# Altium PCB PCB1.PcbDoc
Units mm, origin at the board's own origin, x right, y up, seen from the top; angles counter-clockwise.
Board outline 68 x 58 mm, 2 copper layers (Top Layer, Bottom Layer); 74 components, 73 nets, 275 pads, 50 vias.
Unrouted connection lines stored in the file: 5.
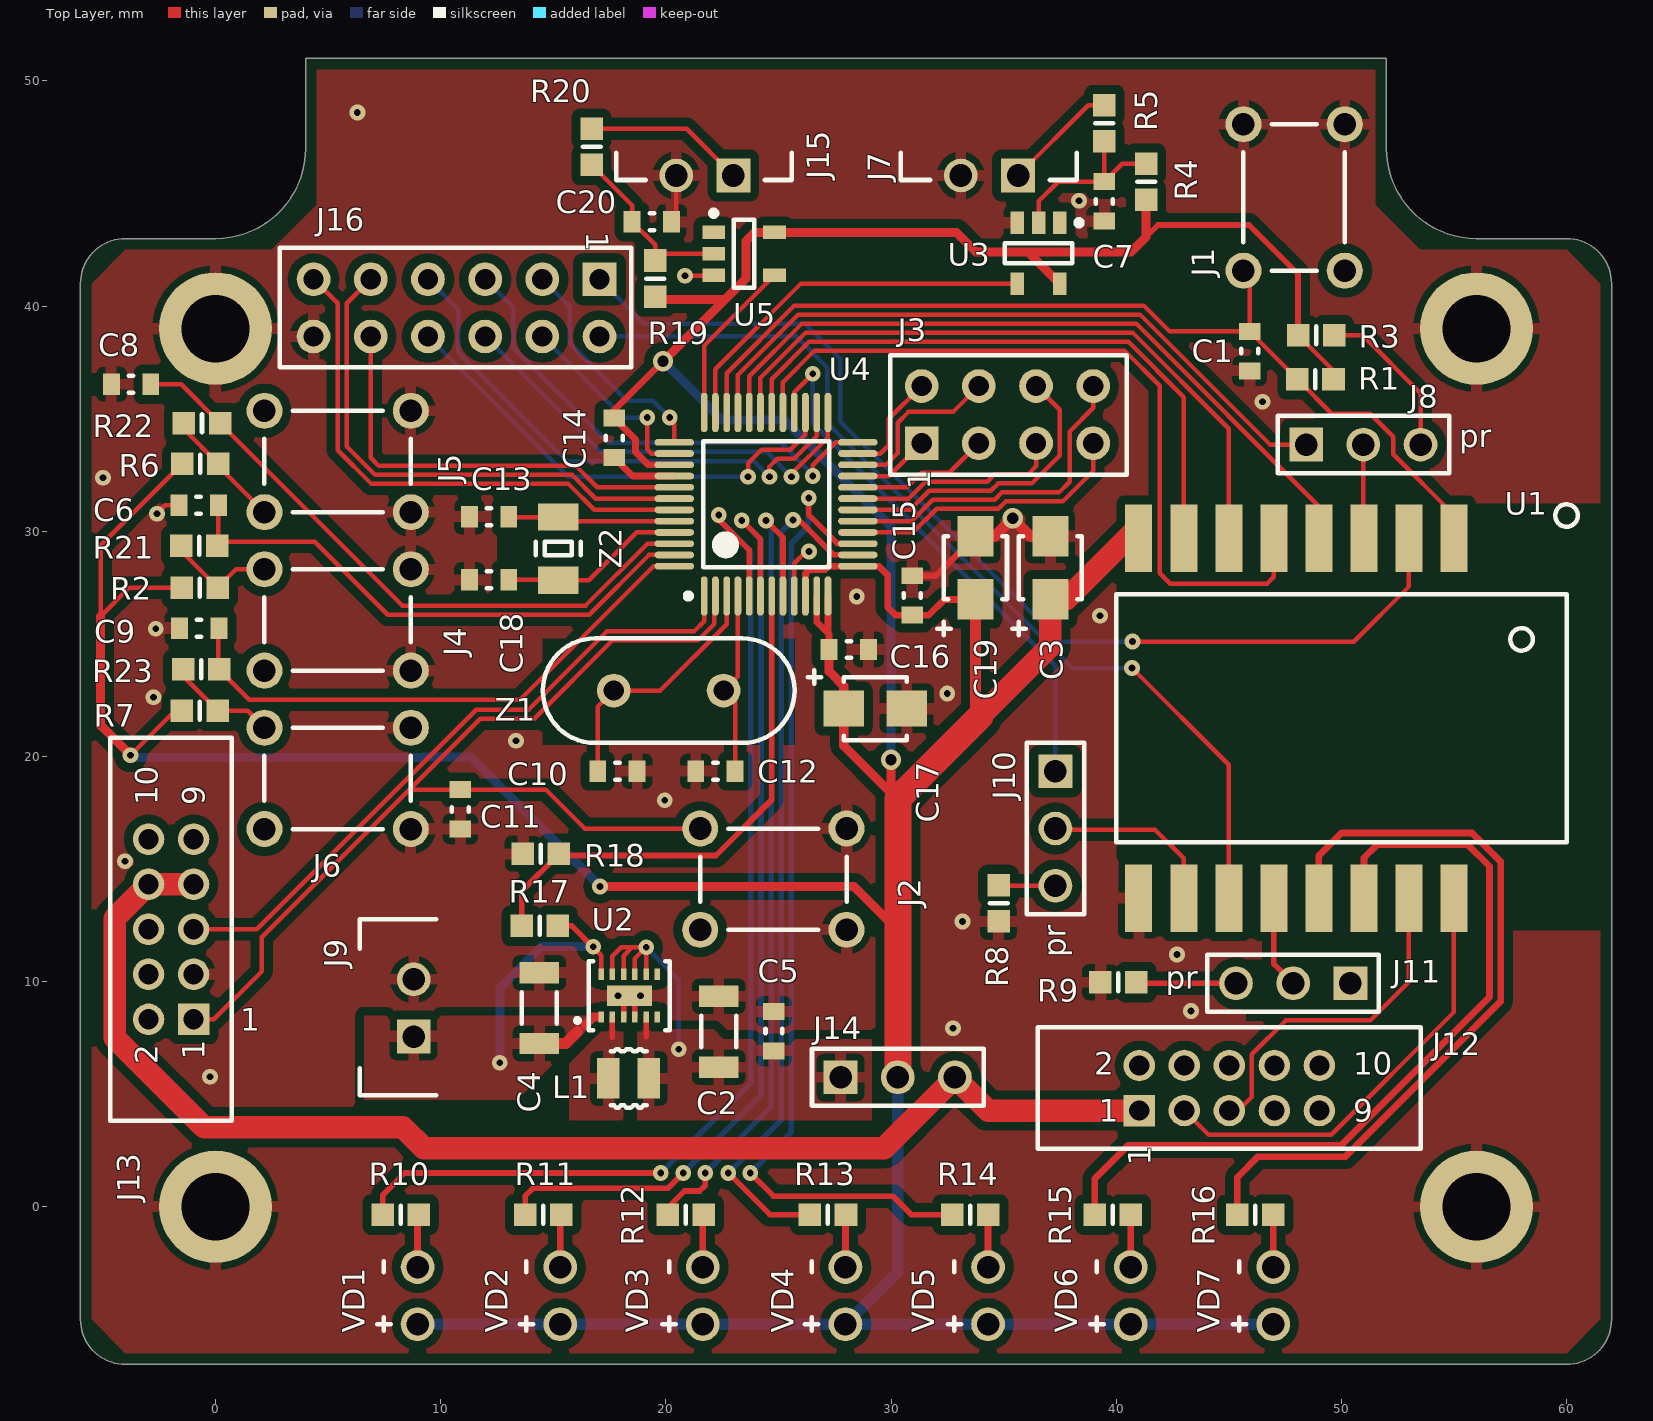
[diagram p0: Top Layer view]
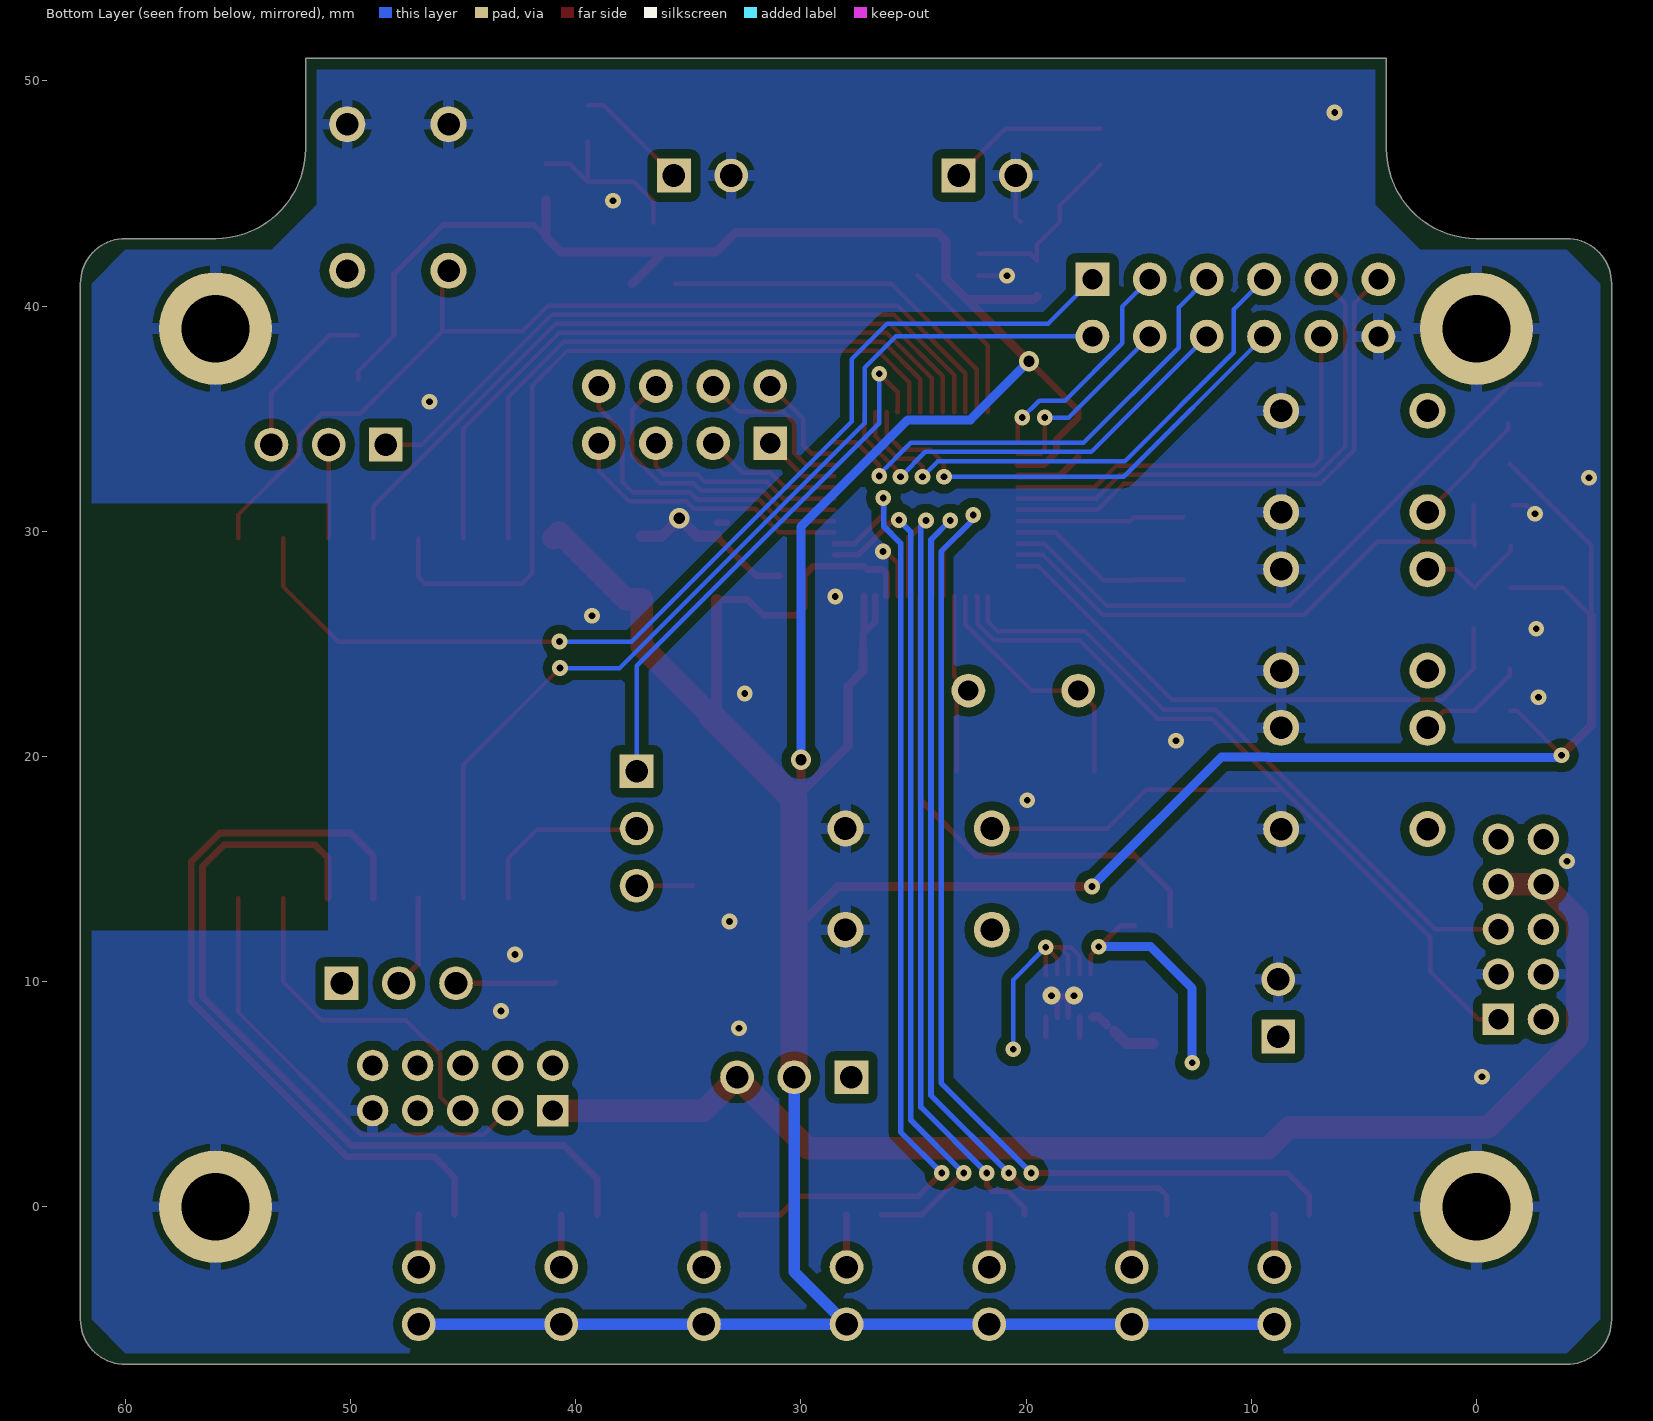
[diagram p1: Bottom Layer view, seen from below]

## Layer stack, top to bottom
Top Solder: solder mask 0.0102, Solder Resist, Dk 3.5
Top Layer: signal copper 0.0356
Dielectric 1: dielectric 0.32, FR-4, Dk 4.8
Bottom Layer: signal copper 0.0356
Bottom Solder: solder mask 0.0102, Solder Resist, Dk 3.5

## Board outline
-6,-5 -6,41 cw(c-4,41) -4,43 0,43 ccw(c0,47) 4,47 4,51 52,51 52,47 ccw(c56,47) 56,43 60,43 cw(c60,41) 62,41 62,-5 cw(c60,-5) 60,-7 -4,-7 cw(c-4,-5)

## Design rules (kind name [scope] priority, off if disabled: settings)
AssemblyTestPointUsage [All] p1 off:
AssemblyTestPointUsage UnpouredPolygon [All] p2 off:
AssemblyTestPointUsage BoardOutlineClearance [All] p3 off:
AssemblyTestpoint [All] p1 off: testpointundercomponent=TRUE minsize=1.016 maxsize=2.54 preferedsize=1.524 minholesize=0 maxholesize=1.016 preferedholesize=0.813 testpointgrid=0.025 usegrid=TRUE gridtolerance=0 allowsidetop=TRUE allowsidebottom=TRUE
Clearance Polygons [OnLayer('Top Layer') or OnLayer('Bottom Layer') or OnLayer('Multi-Layer') vs OnLayer('Top Layer') or OnLayer('Bottom Layer') or OnLayer('Multi-Layer')] p1: gap=0.2 ignorepadtopadclearanceinfootprint=FALSE except(0: Arc-Hole Track-Hole SMDPad-Hole THPad-Hole Via-Hole Fill-Hole Poly-Hole Region-Hole Text-Hole; 0.4: Arc-Poly Track-Poly SMDPad-Poly THPad-Poly Via-Poly Fill-Poly Poly-Poly Poly-Region)
Clearance [All] p2: gap=0.2 ignorepadtopadclearanceinfootprint=FALSE except(0: Arc-Hole Track-Hole SMDPad-Hole THPad-Hole Via-Hole Fill-Hole Poly-Hole Region-Hole Text-Hole)
FabricationTestPointUsage [All] p1 off: valid=0 allowmultiple=FALSE
FabricationTestpoint [All] p1 off: side=3 testpointundercomponent=TRUE minsize=1.016 maxsize=2.54 preferedsize=1.524 minholesize=0 maxholesize=1.016 preferedholesize=0.813 testpointgrid=0.025 allowsidetop=TRUE allowsidebottom=TRUE usegrid=TRUE gridtolerance=0
HoleSize [All] p1: absolutevalues=TRUE maxlimit=6 minlimit=0.3 maxpercent=80.000 minpercent=20.000 // ПП до 2,5мм толщины
HoleToHoleClearance [All] p1: gap=0.2 allowstackedmicrovias=TRUE
MinimumSolderMaskSliver [All] p1: minsoldermaskwidth=0.15
PlaneClearance [All] p1: clearance=0.3
PlaneConnect [All] p1: planeconnectstyle=Relief reliefexpansion=0.2 reliefentries=4 reliefconductorwidth=0.5 reliefairgap=0.5
PolygonConnect [All] p1: thpad.connectstyle=Relief thpad.reliefconductorwidth=0.5 thpad.reliefentries=4 thpad.polygonreliefangle="90 Angle" thpad.airgapwidth=0.3 smdpad.connectstyle=Relief smdpad.reliefconductorwidth=0.5 smdpad.reliefentries=4 smdpad.polygonreliefangle="90 Angle" smdpad.airgapwidth=0.3 via.connectstyle=Direct via.reliefconductorwidth=0.3 via.reliefentries=4 via.polygonreliefangle="90 Angle" via.airgapwidth=0.3
RoutingVias [All] p1: holewidth=0.5 width=0.9 viastyle="Through Hole" minholewidth=0.3 minwidth=0.7 maxholewidth=6 maxwidth=6.4
SilkToSilkClearance [All] p1: silktosilkclearance=0.15
SilkToSolderMaskClearance [All] p1: minsilkscreentomaskgap=0.15 clearancetoexposedcopper=FALSE
SolderMaskExpansion [All] p1: expansion=0.05
UnpouredPolygon UnpouredPolygon_1 [All] p1:
Width [All] p1: maxlimit=10 minlimit=0.2 preferedwidth=0.5
18 further rules are at their usual default settings.

## Components (designator, comment, footprint, x,y, rotation, side; value= is the part's Value field where it differs from the comment)
C1 "Capacitor" 0603(CAPC1608X09N) 45.925,38 r90 top value=0.1uF
C2 "Capacitor" 1206(CAPC3216X15N) 22.35,7.775 r270 top value=10uF
C3 "Capacitor Polarized" 1206(typeA) 37.075,28.375 r90 top value="10uF, 6.3V"
C4 "Capacitor" 1206(CAPC3216X15N) 14.375,8.825 r90 top value=10uF
C5 "Capacitor" 0603(CAPC1608X09N) 24.8,7.8 r270 top value=0.1uF
C6 "Capacitor" 0603(CAPC1608X09N) -0.75,31.15 r0 top value=100nF
C7 "Capacitor" 0603(CAPC1608X09N) 39.475,44.65 r90 top value=10nF
C8 "Capacitor" 0603(CAPC1608X09N) -3.75,36.525 r0 top value=100nF
C9 "Capacitor" 0603(CAPC1608X09N) -0.725,25.7 r0 top value=100nF
C10 "Capacitor" 0603(CAPC1608X09N) 17.85,19.35 r180 top value=20pF
C11 "Capacitor" 0603(CAPC1608X09N) 10.875,17.65 r90 top value=0.1uF
C12 "Capacitor" 0603(CAPC1608X09N) 22.2,19.35 r0 top value=20pF
C13 "Capacitor" 0603(CAPC1608X09N) 12.15,30.65 r0 top value=25pF
C14 "Capacitor" 0603(CAPC1608X09N) 17.7,34.15 r90 top value=0.1uF
C15 "Capacitor" 0603(CAPC1608X09N) 30.95,27.15 r270 top value=0.1uF
C16 "Capacitor" 0603(CAPC1608X09N) 28.125,24.75 r0 top value=0.1uF
C17 "Capacitor Polarized" 1206(typeA) 29.3,22.125 r0 top value="1uF, 6.3V"
C18 "Capacitor" 0603(CAPC1608X09N) 12.15,27.85 r0 top value=25pF
C19 "Capacitor Polarized" 1206(typeA) 33.75,28.375 r90 top value="10uF, 6.3V"
C20 "Capacitor" 0603(CAPC1608X09N) 19.375,43.75 r180 top value=10nF
J1 "FSM4JH" FSM4JH 47.9,44.825 r270 top
J2 "FSM4JH" FSM4JH 24.775,14.55 r0 top
J3 "PLD-8" PLD-8 31.36,33.91 r0 top
J4 "FSM16JH" FSM16JH 5.425,26.062 r180 top
J5 "FSM16JH" FSM16JH 5.425,33.1 r180 top
J6 "FSM16JH" FSM16JH 5.425,19.025 r180 top
J7 "CWF-2R" DS1069-2MRW6XB 35.64,45.8 r180 top
J8 "PLS-3" PLS-3 50.975,33.85 r0 top
J9 "CWF-2" DS1069-2MVW6X 8.8,7.56 r90 top
J10 "PLS-3" PLS-3 37.3,16.8 r270 top
J11 "PLS-3" PLS-3 47.86,9.925 r180 top
J12 "IDC2-10MS" IDC2-10MS 45.025,5.275 r0 top
J13 "IDC2-10MS" IDC2-10MS -1.975,12.325 r90 top
J14 "PLS-3" PLS-3 30.3,5.75 r0 top
J15 "CWF-2R" DS1069-2MRW6XB 23,45.8 r180 top
J16 "PLD-12" PLD-12 17.055,41.19 r180 top
L1 "Inductor" "0806 (2016)" 18.35,5.7 r180 top value=4.7uH
R1 "Resistor" 0603(RESC1608X05N) 48.85,36.75 r0 top value=10k
R2 "Resistor" 0603(RESC1608X05N) -0.7,27.5 r180 top value=10k
R3 "Resistor" 0603(RESC1608X05N) 48.875,38.7 r180 top value=10k
R4 "Resistor" 0603(RESC1608X05N) 41.325,45.525 r270 top value=680k
R5 "Resistor" 0603(RESC1608X05N) 39.475,48.125 r90 top value=47k
R6 "Resistor" 0603(RESC1608X05N) -0.675,33 r180 top value=10k
R7 "Resistor" 0603(RESC1608X05N) -0.7,22.025 r180 top value=10k
R8 "Resistor" 0603(RESC1608X05N) 34.775,13.475 r270 top value=10k
R9 "Resistor" 0603(RESC1608X05N) 40.1,9.975 r180 top value=10k
R10 "Resistor" 0603(RESC1608X05N) 8.225,-0.35 r0 top value=120
R11 "Resistor" 0603(RESC1608X05N) 14.55,-0.35 r0 top value=120
R12 "Resistor" 0603(RESC1608X05N) 20.875,-0.35 r0 top value=120
R13 "Resistor" 0603(RESC1608X05N) 27.2,-0.35 r0 top value=120
R14 "Resistor" 0603(RESC1608X05N) 33.525,-0.35 r0 top value=120
R15 "Resistor" 0603(RESC1608X05N) 39.85,-0.35 r0 top value=150
R16 "Resistor" 0603(RESC1608X05N) 46.175,-0.35 r0 top value=150
R17 "Resistor" 0603(RESC1608X05N) 14.4,12.475 r0 top value=470k
R18 "Resistor" 0603(RESC1608X05N) 14.45,15.675 r0 top value=220k
R19 "Resistor" 0603(RESC1608X05N) 19.525,41.225 r270 top value=680k
R20 "Resistor" 0603(RESC1608X05N) 16.7,47.075 r90 top value=47k
R21 "Resistor" 0603(RESC1608X05N) -0.725,29.35 r0 top value=10k
R22 "Resistor" 0603(RESC1608X05N) -0.6,34.8 r0 top value=10k
R23 "Resistor" 0603(RESC1608X05N) -0.625,23.875 r0 top value=10k
U1 "ESP-07" ESP-07 39.5,21.7 r270 top
U2 "TPS62745" "12-WSON (3x2)" 18.375,9.375 r90 top
U3 "SN74LVC1G14" SOT23-5 36.55,42.35 r270 top
U4 "STM8L052C6T6" LQFP-48 24.45,31.2 r90 top
U5 "SN74LVC1G14" SOT23-5 23.475,42.325 r0 top
VD1 "Led" GNL-3014xx 8.975,-5.215 r90 top
VD2 "Led" GNL-3014xx 15.308,-5.215 r90 top
VD3 "Led" GNL-3014xx 21.642,-5.215 r90 top
VD4 "Led" GNL-3014xx 27.975,-5.215 r90 top
VD5 "Led" GNL-3014xx 34.308,-5.215 r90 top
VD6 "Led" GNL-3014xx 40.642,-5.215 r90 top
VD7 "Led" GNL-3014xx 46.975,-5.215 r90 top
Z1 "Crystal Oscillator" HC49S 20.125,22.925 r180 top value=16MHz
Z2 "Crystal Oscillator" KX–327NHT 15.225,29.225 r90 top value=32.768kHz

## Footprints (in the part's own frame and the unit in brackets; to place one, negate y for a bottom-side part, rotate by r counter-clockwise, add the part's x,y. Pads: shape width x height; smd on the part's side, far side on the other; paste and mask are expansions set on the pad)
"12-WSON (3x2)" [mm]
  rect 0.5x0.25 smd mask+0.05: 1(-0.95,1.25) 2(-0.95,0.75) 3(-0.95,0.25) 4(-0.95,-0.25) 5(-0.95,-0.75) 6(-0.95,-1.25) 7(0.95,-1.25) 8(0.95,-0.75) 9(0.95,-0.25) 10(0.95,0.25) 11(0.95,0.75) 12(0.95,1.25)
  rect 0.9x2 smd mask+0.05: 13(0,0)
  silkscreen extent -1.53,-1.8 1.53,2.4, body extent -1.05,-1.55 1.05,1.55, height 0.8
0603(CAPC1608X09N) [mm] "Chip Capacitor, 2-Leads, Body 1,6x0,8mm, IPC Medium Density"
  rect 0.75x0.95 smd mask+0.05: 1(-0.875,0) 2(0.875,0)
  silkscreen extent -0.1,-0.38 0.1,0.38, body extent -0.8,-0.4 0.8,0.4, height 0.9
0603(RESC1608X05N) [mm] "Chip Resistor, 2-Leads, Body 1,6x0,8mm, IPC Medium Density"
  rect 1x1 smd mask+0.05: 1(-0.8,0) 2(0.8,0)
  silkscreen extent 0,-0.4 0,0.4, body extent -0.8,-0.4 0.8,0.4, height 0.38
"0806 (2016)" [mm]
  rect 1x1.8 smd: 1(-0.9,0) 2(0.9,0)
  silkscreen extent -0.8,-1.3 0.8,1.3, body extent -1,-0.8 1,0.8, height 1
1206(CAPC3216X15N) [mm] "Chip Capacitor, 2-Leads, Body 3,2x1,6mm, IPC Medium Density"
  rect 0.95x1.75 smd: 1(-1.575,0) 2(1.575,0)
  silkscreen extent -0.7,-0.77 0.7,0.77, body extent -1.6,-0.8 1.6,0.8, height 1.52
1206(typeA) [mm]
  rect 1.8x1.6 smd: 1(-1.4,0) 2(1.4,0)
  silkscreen extent -3,-1.4 1.4,1.7, body extent -1.6,-0.8 1.6,0.8, height 1.6
DS1069-2MRW6XB [mm]
  rect 1.5x1.5 hole 1: 1(0,0)
  round 1.5 hole 1: 2(2.54,0)
  silkscreen extent -2.6,-1 5.2,0.2, body extent -2.4,-7.32 5,0.32, height 5.75
DS1069-2MVW6X [mm]
  rect 1.5x1.5 hole 1: 1(0,0)
  round 1.5 hole 1: 2(2.54,0)
  silkscreen extent -2.6,-1 5.2,2.4, body extent -2.45,-3.57 5.05,2.17, height 7
ESP-07 [mm] "Wifi Module"
  rect 3x1.2 smd: 1(-8,15.5) 2(-8,13.5) 3(-8,11.5) 4(-8,9.5) 5(-8,7.5) 6(-8,5.5) 7(-8,3.5) 8(-8,1.5) 9(8,1.5) 10(8,3.5) 11(8,5.5) 12(8,7.5) 13(8,9.5) 14(8,11.5) 15(8,13.5) 16(8,15.5)
  silkscreen extent -9.5,0.5 5.5,21, body extent -8,0 8,21.2, height 3
FSM4JH [mm]
  round 1.6 hole 1: 1(-3.25,2.25) 1(-3.25,-2.25) 2(3.25,2.25) 2(3.25,-2.25)
  silkscreen extent -3.25,-2.25 3.25,2.25, body extent -3.9,-2.99 3.9,3, height 5
FSM16JH [mm]
  round 1.6 hole 1: 1(-3.25,2.25) 1(-3.25,-2.25) 2(3.25,2.25) 2(3.25,-2.25)
  silkscreen extent -3.25,-2.25 3.25,2.25, body extent -3.9,-2.99 3.9,3, height 17
GNL-3014xx [mm]
  round 1.5 hole 1: 1(0,0) 2(2.54,0)
  silkscreen extent -0.3,1.2 2.8,1.8
HC49S [mm]
  round 1.5 hole 0.9: 1(-2.44,0) 2(2.44,0)
  silkscreen extent -5.59,-2.32 5.59,2.32, body extent -5.58,-2.32 5.6,2.35, height 3.63
IDC2-10MS [mm]
  rect 1.4x1.4 hole 0.9: 1(-4,-1)
  round 1.4 hole 0.9: 2(-4,1) 3(-2,-1) 4(-2,1) 5(0,-1) 6(0,1) 7(2,-1) 8(2,1) 9(4,-1) 10(4,1)
  silkscreen extent -8.5,-2.7 8.5,2.7, body extent -8.6,-2.75 8.6,2.75, height 5.6
KX–327NHT [mm] "Quartz"
  rect 1.2x1.8 smd: 1(-1.4,0) 2(1.4,0)
  silkscreen extent -0.3,-1 0.3,1, body extent -1.6,-0.75 1.6,0.75, height 0.71
LQFP-48 [mm] "TSQFP, 48-Leads, Body 9,2x9,2mm (max), Pitch 0,50mm, IPC Medium Density"
  oval 1.75x0.3 smd: 1(-4.075,2.75) 2(-4.075,2.25) 3(-4.075,1.75) 4(-4.075,1.25) 5(-4.075,0.75) 6(-4.075,0.25) 7(-4.075,-0.25) 8(-4.075,-0.75) 9(-4.075,-1.25) 10(-4.075,-1.75) 11(-4.075,-2.25) 12(-4.075,-2.75) 25(4.075,-2.75) 26(4.075,-2.25) 27(4.075,-1.75) 28(4.075,-1.25) 29(4.075,-0.75) 30(4.075,-0.25) 31(4.075,0.25) 32(4.075,0.75) 33(4.075,1.25) 34(4.075,1.75) 35(4.075,2.25) 36(4.075,2.75)
  oval 0.3x1.75 smd: 13(-2.75,-4.075) 14(-2.25,-4.075) 15(-1.75,-4.075) 16(-1.25,-4.075) 17(-0.75,-4.075) 18(-0.25,-4.075) 19(0.25,-4.075) 20(0.75,-4.075) 21(1.25,-4.075) 22(1.75,-4.075) 23(2.25,-4.075) 24(2.75,-4.075) 37(2.75,4.075) 38(2.25,4.075) 39(1.75,4.075) 40(1.25,4.075) 41(0.75,4.075) 42(0.25,4.075) 43(-0.25,4.075) 44(-0.75,4.075) 45(-1.25,4.075) 46(-1.75,4.075) 47(-2.25,4.075) 48(-2.75,4.075)
  silkscreen extent -4.2,-2.8 2.8,3.57, body extent -4.5,-4.5 4.5,4.5, height 1.56
PLD-8 [mm]
  rect 1.5x1.5 hole 0.9: 1(0,0)
  round 1.5 hole 0.9: 2(0,2.54) 3(2.54,0) 4(2.54,2.54) 5(5.08,0) 6(5.08,2.54) 7(7.62,0) 8(7.62,2.54)
  silkscreen extent -1.4,-1.4 9.1,3.9, body extent -1.22,-1.28 8.94,3.8, height 8.8
PLD-12 [mm]
  rect 1.5x1.5 hole 0.9: 1(0,0)
  round 1.5 hole 0.9: 2(0,2.54) 3(2.54,0) 4(2.54,2.54) 5(5.08,0) 6(5.08,2.54) 7(7.62,0) 8(7.62,2.54) 9(10.16,0) 10(10.16,2.54) 11(12.7,0) 12(12.7,2.54)
  silkscreen extent -1.4,-1.4 14.2,3.9, body extent -1.22,-1.28 14.02,3.8, height 8.8
PLS-3 [mm]
  rect 1.5x1.5 hole 1: 1(-2.54,0)
  round 1.5 hole 1: 2(0,0) 3(2.54,0)
  silkscreen extent -3.81,-1.27 3.81,1.27, body extent -3.8,-1.3 3.82,1.24, height 8.8
SOT23-5 [mm] "SOT23, 5-Leads, Body 2,90x2,80mm, Pitch 0,95mm, IPC Medium Density"
  rect 1x0.6 smd: 1(-1.35,0.95) 2(-1.35,0) 3(-1.35,-0.95) 4(1.35,-0.95) 5(1.35,0.95)
  silkscreen extent -1.47,-1.5 0.45,1.93, body extent -0.85,-1.5 0.85,1.5, height 1.45

## Part data
C3 C17 C19: library part "Polarized Capacitor", "Polarized Capacitor", Name="Конденсатор электролитический танталовый SMD"
J1 J2 J4 J5 J6: library part "Tact switch", "Tact switch"
  J1 J2: Model=FSM4JH
  J4 J5 J6: Model=FSM16JH
J3: "Вилка штыревая PLD-8, прямая", Manufacturer=Connfly, Model=PLD-8
J7 J15: "Вилка на плату CWF-2R, угловая", Manufacturer=Connfly, Part number=DS1069-2MRW6XB, Model=DS1069-2MRW6XB
J8 J10 J11 J14: "Вилка штыревая PLS-3, прямая", Name="Вилка штыревая PLS-3, прямая"
J9: "Вилка на плату CWF-2, прямая", Manufacturer=Connfly, Part number=DS1069-2MVW6X, Model=DS1069-2MVW6X
J12 J13: "Вилка на плату IDC2-10MS, прямая", Name="Вилка на плату IDC2-10MS, прямая"
J16: "Вилка штыревая PLD-12, прямая", Manufacturer=Connfly, Model=PLD-12
U1: "WiFi module", Model=ESP-07
U2: "DC/DC step down", Manufacturer="Texas Instruments", Package="12-WSON (3x2)", Part number=TPS62745DSST, Datasheet=http://www.ti.com/lit/ds/symlink/tps62745.pdf, Model=TPS62745
U3 U5: "Single SchmittT-Trigger Inverter", Manufacturer="Texas Instruments", Package=SOT-23-5, Part number=SN74LVC1G14DBVR, Datasheet=http://www.ti.com/lit/ds/symlink/sn74lvc1g14.pdf, Model=SN74LVC1G14
U4: library part STM8L052C6, "MCU", Manufacturer=STMicroelectronics, Package="48-LQFP (7x7)", Datasheet=https://www.st.com/content/ccc/resource/technical/document/datasheet/05/b6/38/25/7d/c5/4b/cd/DM00057687.pdf/files/DM00057687.pdf/jcr:content/translations/en.DM00057687.pdf, Model=STM8L052C6T6, Part number=STM8L052C6T6
VD1 VD2 VD3 VD4 VD5 VD6 VD7: "Светодиод", Name="Светодиод 1206 зеленый"
Z1 Z2: library part Crystal, Name="Кварцевый резонатор"
C1 C2 C4 C5 C6 C7 C8 C9 C10 C11 C12 C13 C14 C15 C16 C18 C20: Name="Конденсатор керамический SMD"
L1: Model=DFE201612E, Name="Индуктивность SMD"
R1 R2 R3 R4 R5 R6 R7 R8 R9 R10 R11 R12 R13 R14 R15 R16 R17 R18 R19 R20 R21 R22 R23: Name="Резистор SMD"

## Free pads (board coordinates)
  round 5 hole 3: 1(0,0) 1(0,39) 1(56,0) 1(56,39)

## Via types
v1: diameter 0.7, hole 0.3, Top Layer to Bottom Layer, 45 vias
v2: diameter 0.9, hole 0.5, Top Layer to Bottom Layer, 3 vias
v3: diameter 0.8, hole 0.3, Top Layer to Bottom Layer, 2 vias

## Nets (pads, with @x,y where several pads share a name; then routed paths per layer and width w, separated by ;. In a path a pad name is that pad's centre, name@x,y a point inside that pad or via, vN(x,y) a via of type N, cw(c..) or ccw(c..) an arc to the next point about the centre after c; other vN are vias at no path point)
3.3V: C3.1 C14.2 C15.2 C16.1 C17.1 C19.1 J14.2 R1.2 R2.2 R3.2 R4.2 R6.2 R7.2 R19.2 U1.8 U3.5 U4.10 U4.11 U4.12 U4.13 U4.39 U5.5 VD1.1 VD2.1 VD3.1 VD4.1 VD5.1 VD6.1 VD7.1 | length 244.6
  Top Layer w0.2: v1(-3.775,20.05) -1.8,22.025 R7.2 ; R2.2 -3.825,27.5 -5.1,26.225 -5.1,29.375 R6.2 ; R3.2 49.65,37.125 R1.2
  Top Layer w0.25: 41.325,43.075 41.85,43.6 45.9,43.6 48.075,41.425 R3.2
  Top Layer w0.3: v2(19.875,37.55) 17.7,35.375 C14.2 18.65,34.075 18.65,33.525 19.225,32.95 U4.39 ; U4.10 26.2,28.125 26.375,28.3 27.075,28.3 27.225,28.45 U4.13 29.45,28.45 29.85,28.05 29.85,26.625 30.2,26.275 C15.2 31.675,26.275 32.375,26.975 C19.1 ; U4.11 26.7,25.975 27.2,25.475 ; U4.12 27.2,25.475 ; C16.1 27.25,25.425 27.2,25.475
  Top Layer w0.4: -5.1,26.225 -5.1,21.375 v1(-3.775,20.05) ; v1(17.075,14.225) 28.35,14.225 30,12.575 30.3,12.575 ; R19.2 19.663,40.288 22.612,40.288 ; v2(19.875,37.55) 22.612,40.288 ; C16.1 27.25,23.775 27.9,23.125 C17.1 27.9,20.475 30,18.375 ; v2(30,19.85) 30,18.375 ; 30.3,18.075 30,18.375 ; 30.938,18.912 31.087,18.912 ; U3.5 36.1,42.4 ; R4.2 41.325,43.075 40.65,42.4 36.1,42.4 ; 22.612,40.288 23.55,41.225 23.55,42.875 23.95,43.275 U5.5 32.9,43.275 33.775,42.4 36.1,42.4
  Top Layer w0.5: C19.1 33.75,21.975 33.95,21.775
  Top Layer w1: 33.95,21.775 37.075,24.9 C3.1 37.775,26.975 40.75,29.95 U1.8
  Top Layer w1.2: J14.2 30.3,12.575 30.3,18.075 ; 30.3,18.125 31.087,18.912 33.95,21.775
  Bottom Layer w0.4: v1(-3.775,20.05) -3.675,19.95 9.224,19.95 9.249,19.975 11.325,19.975 v1(17.075,14.225) ; v2(19.875,37.55) 22.475,34.95 25.25,34.95 30,30.2 v2(30,19.85)
  Bottom Layer w0.5: VD1.1 VD2.1 VD3.1 VD4.1 ; J14.2 30.3,-2.89 VD4.1 ; VD7.1 VD6.1 VD5.1 VD4.1
3.3VDC: C2.2 C5.2 J14.1 L1.1 U2.5 U2.8 U2.9 U2.10 U2.11 | length 12.4
  Top Layer w0.2: U2.11 17.625,11.125 18.025,11.525 18.5,11.525 ; U2.10 18.125,11.15 18.5,11.525 ; U2.9 18.625,11.025 v1(19.125,11.525) ; U2.8 v1(19.125,11.525) ; 18.5,11.525 v1(19.125,11.525)
  Top Layer w0.25: 19.125,7.55 U2.5
  Bottom Layer w0.2: v1(19.125,11.525) 20.575,10.075 v1(20.575,7)
3.3VPROG: J12.1 J13.7 J13.8 J14.3 | length 58.9
  Top Layer w1: J13.7 J13.8 -4.475,12.825 -4.475,7.5 -0.5,3.525 8.325,3.525 9.25,2.6 29.69,2.6 J14.3 34.315,4.275 J12.1
ADC: R17.1 R18.2 U4.7 | length 23.5
  Top Layer w0.25: R17.1 13.6,14.025 R18.2 15.25,15.6 22.225,15.6 24.7,18.075 U4.7
BAT+: C4.1 J9.1 R17.2 U2.1 U2.12 | length 14.2
  Top Layer w0.2: v1(16.775,11.55) 16.775,11.525 17.125,11.175 U2.12
  Top Layer w0.25: R17.2 15.825,12.475 16.75,11.55 v1(16.775,11.55)
  Top Layer w0.4: 16.425,8.075 16.775,8.425 U2.1@17.05,8.425
  Top Layer w0.5: C4.1 15.55,7.25 16.075,7.775
  Bottom Layer w0.4: v1(12.625,6.4) 12.625,9.7 14.475,11.55 v1(16.775,11.55)
BUT0: C6.2 R21.2 U4.47 | length 24.5
  Top Layer w0.2: R21.2 0.075,29.537 R21.2@0.125,29.537 ; C6.2 R21.2@0.125,29.537 ; U4.47 19.25,28.95 16.6,26.3 7.65,26.3 4.413,29.537 R21.2@0.125,29.537
BUT1: C8.2 R22.2 U4.46 | length 28.5
  Top Layer w0.2: C8.2 -1.525,36.525 R22.2 8.3,26.7 16.434,26.7 19.184,29.45 U4.46
BUT2: C9.2 R23.2 U4.48 | length 25.1
  Top Layer w0.2: C9.2 0.125,25.675 0.125,23.9 1.5,22.525 13.525,22.525 19.45,28.45 U4.48
CH_PD: J8.2 U1.3 | length 4.2
  Top Layer w0.2: J8.2 50.975,29.725 U1.3
COUNT0: U3.4 U4.35 | length 17
  Top Layer w0.2: U4.35@22.25,35.325 U4.35 22.2,37.2 26,41 U3.4
COUNT1: U4.36 U5.4 | length 7.4
  Top Layer w0.2: U4.36 21.7,38.25 U5.4
ESP_ADC: J16.1 U1.2 | length 47.4
  Top Layer w0.2: v1(40.725,25.1) 50.55,25.1 53,27.55 U1.2
  Bottom Layer w0.2: J16.1 19.02,39.225 26.175,39.225 27.75,37.65 27.75,34.875 37.525,25.1 v1(40.725,25.1)
ESP_EN: J8.1 U4.33 | length 30.4
  Top Layer w0.2: U4.33 23.2,36.947 25.878,39.625 41.056,39.625 46.831,33.85 J8.1
ESP_GPIO0: J11.2 U1.12 | length 4.1
  Top Layer w0.25: U1.12 47,10.785 J11.2
ESP_GPIO2: J16.2 U1.11 | length 43.2
  Top Layer w0.2: v1(40.7,23.925) 45,19.625 U1.11
  Bottom Layer w0.2: J16.2 25.794,38.65 27.175,37.269 27.175,34.8 38.05,23.925 v1(40.7,23.925)
ESP_GPIO15: J10.2 U1.10 | length 8.1
  Top Layer w0.2: J10.2@37.25,16.75 41.725,16.75 43,15.475 U1.10
ESP_RESET: C1.2 J1.2 R1.1 U1.1 U4.34 | length 43.4
  Top Layer w0.2: U4.34 22.7,37.025 25.7,40.025 41.222,40.025 42.372,38.875 C1.2 ; J1.2@45.65,41.575 45.925,41.3 C1.2 ; U1.1 55,30.725 52.3,33.425 52.3,34.2 51.275,35.225 49.575,35.225 R1.1 C1.2
ESP_SLEEP: U1.4 U4.32 | length 32.7
  Top Layer w0.2: U4.32 23.7,36.881 26.044,39.225 40.891,39.225 49,31.116 U1.4
GERC0: J7.1 R5.2 | length 5.1
  Top Layer w0.2: J7.1 38.765,48.925 R5.2
GERC1: J15.1 R20.2 | length 7.2
  Top Layer w0.2: R20.2 20.925,47.875 J15.1
GND: C1.1 C2.1 C3.2 C4.2 C5.1 C6.1 C7.1 C8.1 C9.1 C10.1 C11.1 C12.1 C13.1 C14.1 C15.1 C16.2 C17.2 C18.1 C19.2 C20.1 J1.1 J2.2 J4.1 J5.1 J6.1 J7.2 J9.2 J12.9 J13.3 J13.4 J15.2 J16.12 pad.1 R8.2 R9.2 R18.1 U1.9 U2.3 U2.4 U2.13 U3.3 U4.9 U4.40 U5.3 | length 19.9
  Top Layer w0.2: v1(-2.6,30.775) -2.225,31.15 C6.1 ; C20.1 20.46,43.96 J15.2 ; v1(20.85,41.35) 22.1,41.35 U5.3 ; U4.9 25.7,28.575 26.226,29.101 v1(26.351,29.101)
  Top Layer w0.25: U2.3 18.125,9.125 U2.13 18.625,9.125 U2.4
  Top Layer w0.3: C14.1 18.525,32.45 U4.40 ; C15.1 32,28.025 C19.2 ; C19.2@33.3,30.375 C19.2@33.725,30.375
  Top Layer w0.5: C19.2 34.6,29.775 v2(35.4,30.575) 36.2,29.775 C3.2
  other v1: -0.25,5.775 32.75,7.925 43.325,8.7 42.7,11.2 33.175,12.675 -4.025,15.35 19.95,18.05 13.35,20.7 -2.75,22.625 32.5,22.8 -2.65,25.675 39.275,26.25 28.475,27.1 -5,32.375 46.5,35.75 38.35,44.675 6.3,48.6
  other v3: 17.875,9.375 18.875,9.375
LED1: R10.1 U4.5 | length 49.3
  Top Layer w0.25: R10.1 7.425,0.525 8.4,1.5 v1(19.775,1.5) ; v1(22.35,30.725) 22.35,30.525 23.7,29.175 U4.5
  Bottom Layer w0.25: v1(19.775,1.5) 23.775,5.5 23.775,29.1 22.35,30.525 v1(22.35,30.725)
LED2: R11.1 U4.6 | length 42.7
  Top Layer w0.25: R11.1 13.75,0.475 14.1,0.825 20.1,0.825 v1(20.775,1.5) ; v1(23.375,30.475) 24.2,29.65 U4.6
  Bottom Layer w0.25: v1(20.775,1.5) 24.225,4.95 24.225,29.625 v1(23.375,30.475)
LED3: R12.1 U4.8 | length 36.9
  Top Layer w0.25: R12.1 20.075,-0.05 20.825,0.7 21.5,0.7 21.75,0.95 v1(21.75,1.5) ; v1(24.45,30.475) 25.2,29.725 U4.8
  Bottom Layer w0.25: v1(21.75,1.5) 24.675,4.425 24.675,30.25 v1(24.45,30.475)
LED4: R13.1 U4.14 | length 38.1
  Top Layer w0.25: v1(22.775,1.5) 24.625,-0.35 R13.1 ; v1(25.65,30.5) 25.907,30.5 27.457,28.95 U4.14
  Bottom Layer w0.25: v1(22.775,1.5) 25.125,3.85 25.125,29.975 v1(25.65,30.5)
LED5: R14.1 U4.15 | length 44.2
  Top Layer w0.25: v1(23.75,1.5) 24.775,0.475 30.075,0.475 30.9,-0.35 R14.1 ; v1(26.35,31.475) 26.35,30.725 27.625,29.45 U4.15
  Bottom Layer w0.25: v1(23.75,1.5) 25.575,3.325 25.575,29.47 26.325,30.22 26.325,31.45 v1(26.35,31.475)
LED6: R15.1 U1.14 | length 36.3
  Top Layer w0.3: R15.1 39.05,1.25 40.525,2.725 49.975,2.725 56.575,9.325 56.575,15.125 55.625,16.075 51.575,16.075 51,15.5 U1.14
LED7: R16.1 U1.13 | length 33.7
  Top Layer w0.3: R16.1 45.375,1.3 46.3,2.225 50.182,2.225 57.075,9.118 57.075,15.332 55.807,16.6 50,16.6 49,15.6 U1.13
NetC7_2: C7.2 R4.1 R5.1 U3.2 | length 8.2
  Top Layer w0.2: U3.2 36.55,44.65 37.425,45.525 C7.2 ; R5.1 C7.2 ; R4.1 40.275,46.325 C7.2
NetC10_2: C10.2 U4.3 Z1.2 | length 11.4
  Top Layer w0.2: C10.2 16.975,22.215 Z1.2 19.756,22.925 22.7,25.869 U4.3
NetC12_2: C12.2 U4.4 Z1.1 | length 8.2
  Top Layer w0.2: C12.2 23.075,22.415 Z1.1 23.2,23.56 U4.4
NetC13_2: C13.2 U4.44 Z2.2 | length 7.4
  Top Layer w0.2: C13.2 13.05,30.625 Z2.2 15.4,30.45 U4.44
NetC18_2: C18.2 U4.45 Z2.1 | length 8.2
  Top Layer w0.2: C18.2 15.2,27.85 Z2.1 16.575,27.825 18.7,29.95 U4.45
NetC20_2: C20.2 R19.1 R20.1 U5.2 | length 8.1
  Top Layer w0.2: R20.1 18.5,44.475 C20.2 19.525,42.725 R19.1 19.825,42.325 U5.2
NetJ4_2: J4.2 R2.1 R21.1 | length 4.9
  Top Layer w0.2: R21.1 -1.525,29.125 R2.1 0.912,28.312 J4.2@2.175,28.312
NetJ5_2: J5.2 R6.1 R22.1 | length 5.4
  Top Layer w0.2: R22.1 -1.4,34.525 R6.1 0.125,32.9 J5.2@2.175,30.85
NetJ6_2: J6.2 R7.1 R23.1 | length 4.9
  Top Layer w0.2: R23.1@-1.475,23.9 -1.475,23.6 R7.1 1.425,22.025 J6.2@2.175,21.275
NetJ8_3: J8.3 R3.1 | length 7.2
  Top Layer w0.2: R3.1 50.95,38.7 53.515,36.135 J8.3
NetJ10_3: J10.3 R8.1 | length 2.5
  Top Layer w0.2: R8.1 34.79,14.26 J10.3
NetJ11_3: J11.3 R9.1 | length 4.5
  Top Layer w0.25: R9.1 40.95,9.925 J11.3 J11.3@45.27,9.975
NetL1_2: L1.2 U2.2 | length 0.9
  Top Layer w0.25: 17.625,7.525 U2.2
NetR10_2: R10.2 VD1.2 | length 2.3
  Top Layer w0.3: VD1.2 8.975,-0.4 R10.2
NetR11_2: R11.2 VD2.2 | length 2.3
  Top Layer w0.3: VD2.2 15.308,-0.392 R11.2
NetR12_2: R12.2 VD3.2 | length 2.3
  Top Layer w0.3: VD3.2 21.642,-0.383 R12.2
NetR13_2: R13.2 VD4.2 | length 2.3
  Top Layer w0.3: VD4.2 27.975,-0.375 R13.2
NetR14_2: R14.2 VD5.2 | length 2.3
  Top Layer w0.3: VD5.2 34.308,-0.367 R14.2
NetR15_2: R15.2 VD6.2 | length 2.3
  Top Layer w0.3: VD6.2 40.642,-0.358 R15.2
NetR16_2: R16.2 VD7.2 | length 2.3
  Top Layer w0.3: VD7.2 R16.2
PB0: J16.5 U4.24 | length 22.2
  Top Layer w0.2: v1(26.525,32.45) 26.525,32.925 27.55,33.95 U4.24
  Bottom Layer w0.2: J16.5 13.225,39.94 13.225,38.15 17.45,33.925 25.125,33.925 26.525,32.525 v1(26.525,32.45)
PB1: J16.6 U4.25 | length 19.7
  Top Layer w0.2: v1(25.575,32.425) 25.575,32.541 27.2,34.166 U4.25
  Bottom Layer w0.2: J16.6 17.1,33.525 24.475,33.525 v1(25.575,32.425)
PB2: J16.7 U4.26 | length 24.1
  Top Layer w0.2: v1(24.6,32.425) 24.6,32.875 24.95,33.225 25.694,33.225 26.7,34.231 U4.26
  Bottom Layer w0.2: J16.7 10.775,39.85 10.775,37.95 15.625,33.1 23.925,33.1 v1(24.6,32.425)
PB3: J16.8 U4.27 | length 21.4
  Top Layer w0.2: v1(23.65,32.425) 23.65,33.025 24.25,33.625 25.528,33.625 26.2,34.297 U4.27
  Bottom Layer w0.2: J16.8 15.66,32.425 v1(23.65,32.425)
PC0: J16.3 U4.37 | length 10.3
  Top Layer w0.2: v1(20.175,35.05) 20.375,34.85 U4.37
  Bottom Layer w0.2: J16.3 15.725,39.98 15.725,38.35 18.275,35.8 19.425,35.8 v1(20.175,35.05)
PC1: J16.4 U4.38 | length 8.8
  Top Layer w0.2: v1(19.175,35.05) 19.175,33.636 19.361,33.45 U4.38
  Bottom Layer w0.2: J16.4 18.115,35.05 v1(19.175,35.05)
PC2: J16.10 U4.41 | length 19.4
  Top Layer w0.2: J16.10 6.895,33.261 7.256,32.9 16.006,32.9 16.956,31.95 U4.41
PC3: J16.9 U4.42 | length 23.4
  Top Layer w0.2: J16.9 5.825,40.12 5.825,33.766 7.091,32.5 15.84,32.5 16.89,31.45 U4.42
PC4: J16.11 U4.43 | length 24.1
  Top Layer w0.2: J16.11 5.425,40.12 5.425,33.6 6.925,32.1 15.674,32.1 16.824,30.95 U4.43
PD0: J3.3 U4.20 | length 6.2
  Top Layer w0.2: U4.20 30.712,31.95 31.362,32.6 32.59,32.6 J3.3
PD1: J3.1 U4.21 | length 3.4
  Top Layer w0.2: U4.21 29.9,32.45 J3.1
PD2: J3.4 U4.22 | length 7.6
  Top Layer w0.2: U4.22 29.775,32.95 30.3,33.475 30.3,34.825 30.775,35.3 32.75,35.3 J3.4
PD3: J3.2 U4.23 | length 4.8
  Top Layer w0.2: U4.23 29.525,33.45 29.9,33.825 29.9,34.991 J3.2
PE2: J3.7 U4.16 | length 12.8
  Top Layer w0.2: U4.16 30.975,29.95 32.025,31 34.764,31 35.089,31.325 37.625,31.325 38.98,32.68 J3.7
PE3: J3.8 U4.17 | length 14.8
  Top Layer w0.2: U4.17 30.909,30.45 31.859,31.4 34.599,31.4 34.924,31.725 37.459,31.725 37.93,32.196 37.93,34.43 38.98,35.48 J3.8
PE4: J3.6 U4.18 | length 13.5
  Top Layer w0.2: U4.18 30.844,30.95 31.694,31.8 34.433,31.8 34.758,32.125 36.25,32.125 37.49,33.365 37.49,35.4 J3.6
PE5: J3.5 U4.19 | length 9.5
  Top Layer w0.2: U4.19 30.778,31.45 31.528,32.2 34.267,32.2 34.592,32.525 36.084,32.525 36.44,32.881 J3.5
SPI_MISO: U1.6 U4.31 | length 29.8
  Top Layer w0.2: U4.31 24.2,36.816 26.209,38.825 40.725,38.825 45,34.55 U1.6
SPI_MOSI: U1.7 U4.30 | length 27.7
  Top Layer w0.2: U4.30 24.7,36.75 26.375,38.425 40.531,38.425 43,35.956 U1.7
SPI_NSS: J10.1 U4.28 | length 24.3
  Top Layer w0.2: U4.28@25.75,35.325 U4.28 25.7,36.175 v1(26.525,37)
  Bottom Layer w0.2: v1(26.525,37) 26.525,34.8 37.3,24.025 J10.1
SPI_SCK: U1.5 U4.29 | length 34.7
  Top Layer w0.2: U4.29 25.2,36.625 26.6,38.025 40.366,38.025 41.933,36.458 41.933,28.142 42.4,27.675 46.7,27.675 47,27.975 U1.5
STM_RESET: C11.2 J2.1 J13.1 U4.2 | length 46.2
  Top Layer w0.2: J13.1 -0.075,8.325 2.05,10.45 2.05,11.975 8.6,18.525 ; J2.1@21.525,16.8 16.4,16.8 14.675,18.525 C11.2 8.6,18.525 ; U4.2 22.15,27.125 22.15,25.884 21.416,25.15 17.625,25.15 14.15,21.675 11.75,21.675 8.6,18.525
SWIM: J13.5 U4.1 | length 29.5
  Top Layer w0.2: J13.5 1.834,12.325 11.584,22.075 13.9,22.075 17.375,25.55 21.25,25.55 21.7,26 U4.1
UART_RX: J12.5 U1.15 | length 15.2
  Top Layer w0.2: J12.5 45.425,4.275 46.025,4.875 46.025,6.775 47.525,8.275 51.275,8.275 53,10 U1.15
UART_TX: J12.3 U1.16 | length 19.7
  Top Layer w0.2: J12.3 44.1,3.2 49.55,3.2 55,8.65 U1.16
pads on no net: J11.1 J12.2 J12.4 J12.6 J12.7 J12.8 J12.10 J13.2 J13.6 J13.9 J13.10 U2.6 U2.7 U3.1 U5.1

## Polygon pours and split planes (outlines as drawn)
GND on Top Layer "GND_L01_P010" (solid, remove dead copper, pour order 10): -5.5,-5 -5.5,41 -4,42.5 2.5,42.5 4.5,44.5 4.5,50.5 51.5,50.5 51.5,44.5 53.5,42.5 60,42.5 61.5,41 61.5,-5 60,-6.5 -4,-6.5
NetL1_2 on Top Layer "NETL1_2_L01_P006" (solid, pour order 6): 17.5,8.15 15.7,6.35 15.7,3.85 18.2,3.85 18.1,3.95 18.1,7.95 17.7,7.95 17.7,8.15
BAT+ on Top Layer "BAT+_L01_P004" (solid, pour order 4): 17,8.475 6.6,8.475 6.6,4.75 13.4,4.75 17,8.35
3.3VDC on Top Layer "3.3VDC_L01_P008" (solid, pour order 8): 18.725,7.875 18.725,3.85 29.15,3.85 29.15,7.45 22.55,7.45 22.125,7.875
GND on Bottom Layer "GND_L02_P012" (solid, remove dead copper, pour order 12): -4,-6.5 -5.5,-5 -5.5,41 -4,42.5 2.5,42.5 4.5,44.5 4.5,50.5 51.5,50.5 51.5,44.5 53.5,42.5 60,42.5 61.5,41 61.5,-5 60,-6.5

## Other copper
Top Layer:
  pour cut-out: 45.75,11 47.25,11 47.25,8.25 45.75,8.25
  pour cut-out: 14.5,25.25 25.75,25.25 25.75,20.5 14.5,20.5
  pour cut-out: 12.5,31.25 16.25,31.25 16.25,27.25 12.5,27.25
  pour cut-out: 40,31.25 62,31.25 62,12.25 42,12.25 42,15.5 40,15.5
Bottom Layer:
  pour cut-out: 62,12.25 62,31.25 51,31.25 51,12.25

## Silkscreen, mask and mechanical layers (free items; w line width, h text height)
Top Overlay:
  text "1" at 16.475,43.3 h1 r270
  text "pr" at 55.225,33.725 h1
  text "1" at 31.75,31.85 h1 r90
  text "pr" at 37.75,11.075 h1 r90
  text "pr" at 42.2,9.675 h1
  text "1" at 1.1,7.825 h1
  text "1" at 41.525,1.825 h1 r90
Top Solder:
  the board outline again, w0.5
Mechanical 4:
  the board outline again, w0.2

## Text inside footprints (layer, text, board x,y; h text height)
J12: Top Overlay "10" at 50.525,5.875 h1; Top Overlay "9" at 50.525,3.775 h1; Top Overlay "1" at 39.225,3.775 h1; Top Overlay "2" at 39.025,5.875 h1
J13: Top Overlay "10" at -2.575,17.825 h1 r90; Top Overlay "9" at -0.475,17.825 h1 r90; Top Overlay "1" at -0.475,6.525 h1 r90; Top Overlay "2" at -2.575,6.325 h1 r90